# EAGLE board Lab7_FinalProject (EAGLE 9.0.1)
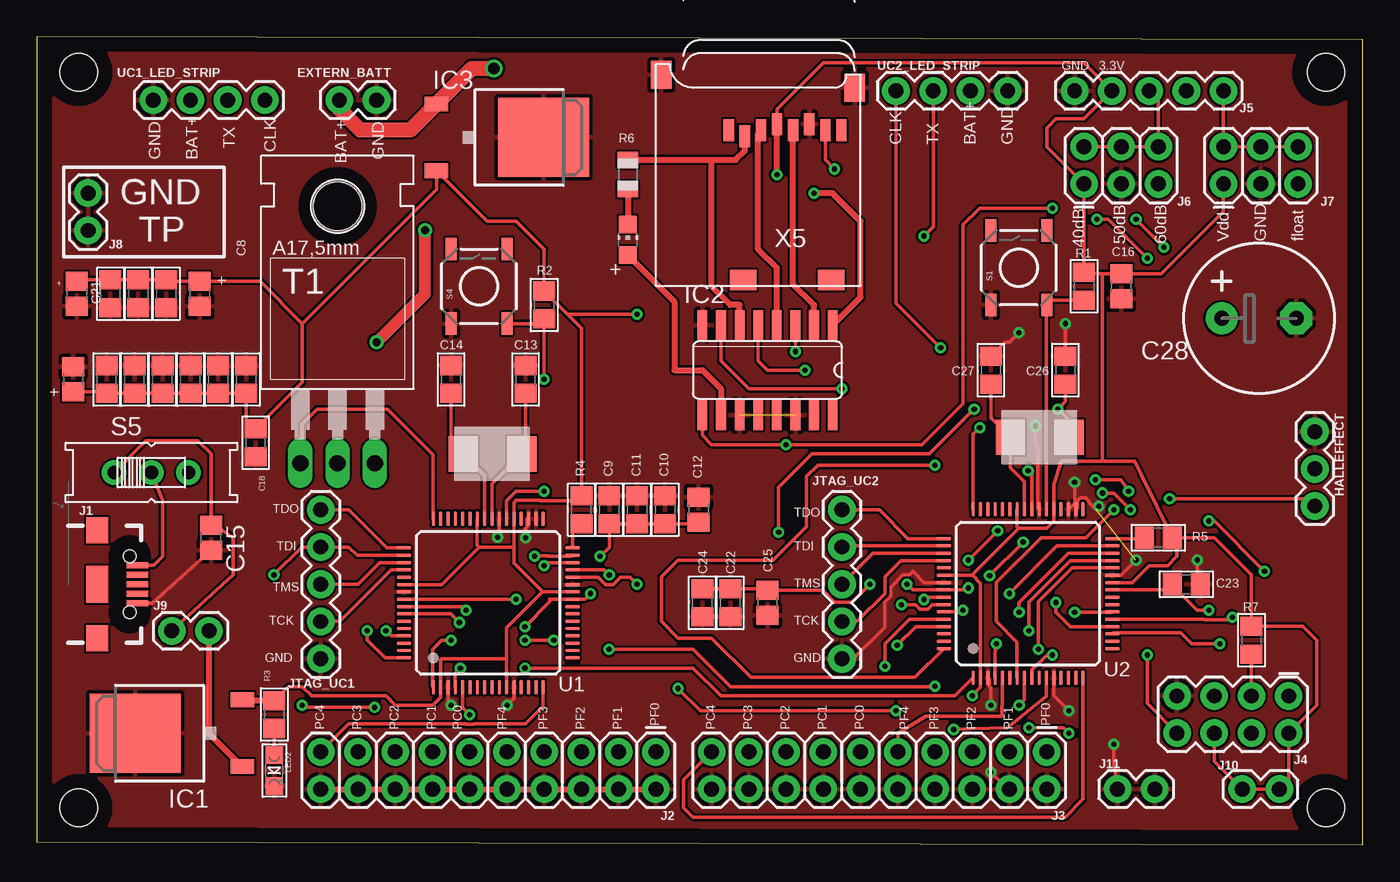
[diagram p0: board, top side]
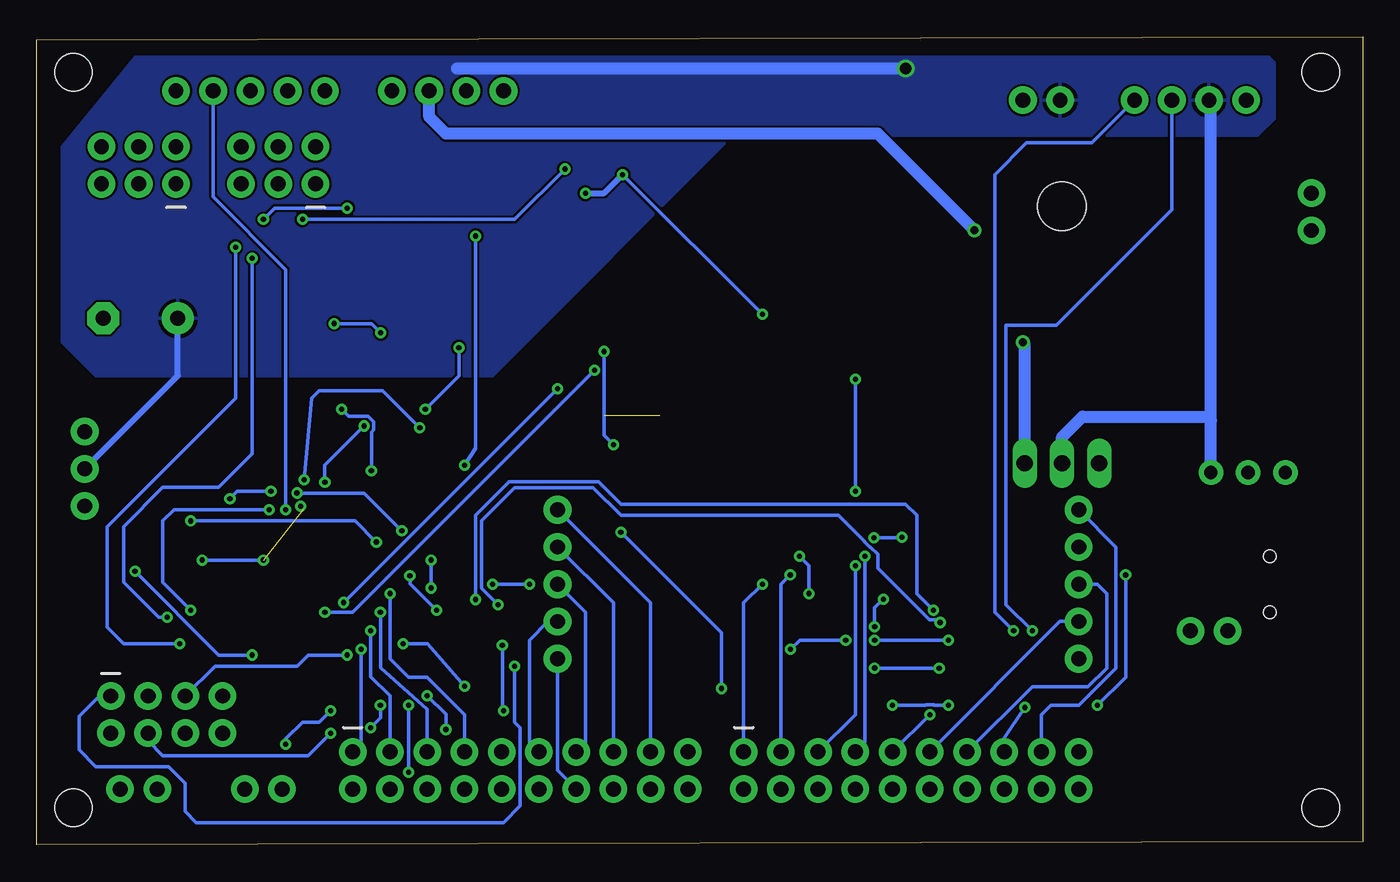
[diagram p1: board, bottom side, seen from below]

Size 90.49 x 55.13 mm. Coordinates in mm from the lower left corner, seen from the top.
Outline: 0,0.21 90.49,0 90.49,54.92 0,55.13 0,0.21
Copper layers (1*16): Top 0.035mm / dielectric 1.5mm / Bottom 0.035mm
Design rules "default": minimum track width 6mil, minimum drill 0.35mm, track to track 6mil, track to pad 6mil, pad to pad 6mil, via to via 6mil, smd to smd 6mil, copper to edge 40mil, drill to drill 6mil, minimum pad ring 10mil, minimum via ring 8mil, stop-mask expansion 4mil, vias tented up to drill 0mil, thermal gap 10mil
Holes 2.54 mm at 2.88,2.54 87.97,2.54 87.97,52.7 2.88,52.7

## Footprints (pad centres in the part's own frame; a part is rotated, then mirrored left to right if it is on the bottom)
CHIP-LED0805 = smd 1.2 x 1.2: A 0,-1.05; C 0,1.05
0805 = smd 1.3 x 1.5: 1 -0.95,0; 2 0.95,0
C0805 = smd 1.3 x 1.5: 1 -0.85,0; 2 0.85,0
E-050X100 = drill 1.016 pad 2.184: + -2.54,0 | drill 1.016 pad 2.184 octagon: - 2.54,0
1X02 = drill 1.016 pad 1.88: 1 0,0; 2 2.54,0
1X03 = drill 1.016 pad 1.88: 1 0,0; 2 2.54,0; 3 5.08,0
TO252 = smd 1 x 1.6: 1 -2.28,-4.8; 2 2.28,-4.8 | smd 5.4 x 6.2: 3 0,2.5
SO16 = smd 0.66 x 2.032: 1 -4.445,-3.073; 2 -3.175,-3.073; 3 -1.905,-3.073; 4 -0.635,-3.073; 5 0.635,-3.073; 6 1.905,-3.073; 7 3.175,-3.073; 8 4.445,-3.073; 9 4.445,3.073; 10 3.175,3.073; 11 1.905,3.073; 12 0.635,3.073; 13 -0.635,3.073; 14 -1.905,3.073; 15 -3.175,3.073; 16 -4.445,3.073
USB-B-MICRO-SMD = smd 1.45 x 0.4: D+ 2.725,0; D- 2.725,0.65; GND 2.725,-1.3; ID 2.725,-0.65; VBUS 2.725,1.3 | smd 1.5 x 1.8: SHIELD1 0,3.685; SHIELD2 0,-3.685 | smd 1.5 x 2.5: SHIELD3 0,0 | hole 0.85: 2.2,1.9; 2.2,-1.9
2X10 = drill 1.016 pad 1.88: 1 0,0; 2 0,2.54; 3 2.54,0; 4 2.54,2.54; 5 5.08,0; 6 5.08,2.54; 7 7.62,0; 8 7.62,2.54; 9 10.16,0; 10 10.16,2.54; 11 12.7,0; 12 12.7,2.54; 13 15.24,0; 14 15.24,2.54; 15 17.78,0; 16 17.78,2.54; 17 20.32,0; 18 20.32,2.54; 19 22.86,0; 20 22.86,2.54
2X4 = drill 1.016 pad 1.88: 1 -3.81,-1.27; 2 -3.81,1.27; 3 -1.27,-1.27; 4 -1.27,1.27; 5 1.27,-1.27; 6 1.27,1.27; 7 3.81,-1.27; 8 3.81,1.27
1X05 = drill 1.016 pad 1.88: 1 0,0; 2 2.54,0; 3 5.08,0; 4 7.62,0; 5 10.16,0
2X3 = drill 1.016 pad 1.88: 1 0,0; 2 0,2.54; 3 2.54,0; 4 2.54,2.54; 5 5.08,0; 6 5.08,2.54
CHIPLED_0805 = smd 1.2 x 1.2: A 0,-1.05; C 0,1.05
R0805 = smd 1.1 x 1.4: 1 -1,0; 2 1,0
TACTILE_SWITCH_SMD = smd 1.524 x 0.762: 1 -2.54,1.905; 2 2.54,1.905; 3 -2.54,-1.905; 4 2.54,-1.905
EG1218 = drill 0.9 pad 1.676: O -2.54,0; P 0,0; S 2.54,0
TO220 = drill 1.118 long: 1 -2.54,-6.35; 2 0,-6.35; 3 2.54,-6.35 | hole 3.302: 0,11.176
LQFP64 = smd 0.25 x 1: 1 -3.75,-5.75; 2 -3.25,-5.75; 3 -2.75,-5.75; 4 -2.25,-5.75; 5 -1.75,-5.75; 6 -1.25,-5.75; 7 -0.75,-5.75; 8 -0.25,-5.75; 9 0.25,-5.75; 10 0.75,-5.75; 11 1.25,-5.75; 12 1.75,-5.75; 13 2.25,-5.75; 14 2.75,-5.75; 15 3.25,-5.75; 16 3.75,-5.75; 33 3.75,5.75; 34 3.25,5.75; 35 2.75,5.75; 36 2.25,5.75; 37 1.75,5.75; 38 1.25,5.75; 39 0.75,5.75; 40 0.25,5.75; 41 -0.25,5.75; 42 -0.75,5.75; 43 -1.25,5.75; 44 -1.75,5.75; 45 -2.25,5.75; 46 -2.75,5.75; 47 -3.25,5.75; 48 -3.75,5.75 | smd 1 x 0.25: 17 5.75,-3.75; 18 5.75,-3.25; 19 5.75,-2.75; 20 5.75,-2.25; 21 5.75,-1.75; 22 5.75,-1.25; 23 5.75,-0.75; 24 5.75,-0.25; 25 5.75,0.25; 26 5.75,0.75; 27 5.75,1.25; 28 5.75,1.75; 29 5.75,2.25; 30 5.75,2.75; 31 5.75,3.25; 32 5.75,3.75; 49 -5.75,3.75; 50 -5.75,3.25; 51 -5.75,2.75; 52 -5.75,2.25; 53 -5.75,1.75; 54 -5.75,1.25; 55 -5.75,0.75; 56 -5.75,0.25; 57 -5.75,-0.25; 58 -5.75,-0.75; 59 -5.75,-1.25; 60 -5.75,-1.75; 61 -5.75,-2.25; 62 -5.75,-2.75; 63 -5.75,-3.25; 64 -5.75,-3.75
NX5032GA-16MHZCRYSTAL = smd 2 x 2.4: P$1 0,0; P$2 4,0
1X04 = drill 1.016 pad 1.88: 1 0,0; 2 2.54,0; 3 5.08,0; 4 7.62,0
MICROSD = smd 0.7 x 1.5: 1 9,-10.64; 2 7.9,-10.24; 3 6.8,-10.64; 4 5.7,-11.04; 5 4.6,-10.64; 6 3.5,-11.04; 7 2.4,-10.64; 8 1.3,-10.64 | smd 1.8 x 1.4: CD1 2,-0.44; CD2 8,-0.44 | smd 1.4 x 1.9: MT1 0.4,-13.54; MT2 13.6,-14.44

## Placement (x,y rotation side)
ACT  RED  [CHIP-LED0805]  40.34,41.28 0 top
C1  0.01uF  [0805]  4.78,31.75 90 top
C2  10uF/10V  [C0805]  2.49,31.75 90 top
C3  0.01uF  [0805]  6.94,37.59 270 top
C4  0.1uF  [0805]  12.4,31.75 90 top
C5  0.01uF  [0805]  14.31,31.75 90 top
C6  0.1uF  [0805]  5.03,37.59 270 top
C7  1uF  [0805]  8.84,37.59 270 top
C8  0.01uF  [C0805]  11.13,37.59 270 top
C9  0.1uF  [0805]  39.07,22.86 90 top
C10  0.1uF  [0805]  42.88,22.86 90 top
C11  1uF  [0805]  40.98,22.86 90 top
C12  2.2uF  [C0805]  45.17,22.86 90 top
C13  10pF  [0805]  33.36,31.75 270 top
C14  10pF  [0805]  28.28,31.75 270 top
C15  4.7uF  [C0805]  11.89,20.95 270 top
C16  4,7uF  [C0805]  74,38.1 270 top
C17  0.1uF  [0805]  8.59,31.75 90 top
C18  0.01uF  [0805]  14.94,27.43 270 top
C19  0.1uF  [0805]  6.69,31.75 90 top
C20  1uF  [0805]  10.5,31.75 90 top
C21  0.01uF  [C0805]  2.75,37.59 270 top
C22  0.1uF  [0805]  47.33,16.51 270 top
C23  0.1uF  [0805]  78.44,17.78 0 top
C24  1uF  [0805]  45.42,16.51 270 top
C25  2.2uF  [C0805]  49.87,16.51 270 top
C26  10pF  [0805]  70.19,32.39 270 top
C27  10pF  [0805]  65.11,32.39 270 top
C28  1000uF  [E-050X100]  83.39,35.92 0 top
EXTERN_BATT  [1X02]  23.2,50.8 180 top
HALLEFFECT  [1X03]  87.2,28.19 270 top
IC1  7812DT  [TO252]  9.23,7.62 90 top
IC2  4050D  [SO16]  49.87,32.39 180 top
IC3  3.3VReg1  [TO252]  32.09,48.26 270 top
J1  [USB-B-MICRO-SMD]  4.15,17.78 0 top
J2  LA1  [2X10]  42.25,6.35 180 top
J3  LA2  [2X10]  68.92,6.35 180 top
J4  ESP8266  [2X4]  81.62,8.89 180 top
J5  MICROPHONE  [1X05]  80.98,51.44 180 top
J6  GAIN SELECT  [2X3]  71.46,45.08 0 top
J7  A/R SELECT  [2X3]  80.98,45.08 0 top
J8  [1X02]  3.51,41.91 90 top
J9  [1X02]  9.23,14.61 0 top
J10  3.3V TESTPOINT  [1X02]  84.79,3.81 180 top
J11  GND TESTPOINT  [1X02]  73.74,3.81 0 top
JTAG_UC1  [1X05]  19.39,12.7 90 top
JTAG_UC2  [1X05]  54.95,12.7 90 top
LED2  [CHIPLED_0805]  16.21,5.08 180 top
R1  10k  [0805]  71.46,38.1 90 top
R2  10k  [0805]  34.63,36.83 90 top
R3  1k  [0805]  16.21,8.89 90 top
R4  1M  [0805]  37.17,22.86 90 top
R5  1M  [0805]  76.54,20.95 0 top
R6  1K  [R0805]  40.34,45.72 270 top
R7  10k  [0805]  82.89,13.97 90 top
S1  MOMENTARY_SW  [TACTILE_SWITCH_SMD]  67.01,39.37 90 top
S4  MOMENTARY_SW  [TACTILE_SWITCH_SMD]  30.18,38.1 90 top
S5  [EG1218]  7.83,25.4 0 top
T1  TIP31  [TO220]  20.53,32.39 0 top
U1  TM4C123GH6PM  [LQFP64]  30.82,16.51 0 top
U2  TM4C123GH6PM  [LQFP64]  67.65,17.14 0 top
U$45  NX5032GA-16MHZCRYSTAL  [NX5032GA-16MHZCRYSTAL]  33.1,26.67 180 top
U$48  NX5032GA-16MHZCRYSTAL  [NX5032GA-16MHZCRYSTAL]  70.44,27.81 180 top
UC1_LED_STRIP  [1X04]  15.58,50.8 180 top
UC2_LED_STRIP  [1X04]  58.63,51.44 0 top
X5  MICROSD  [MICROSD]  56.22,38.1 180 top

## Library data of the parts
ACT C2 C8 C12 C15 C16 C21 C25 R6 S5 X5 = adafruit
C1 C3-C7 C9-C11 C13 C14 C17-C20 C22-C24 C26 C27 LED2 R1-R5 R7 = microbuilder
C28 = cap-master
EXTERN_BATT HALLEFFECT J2-J5 J8-J11 JTAG_UC1 JTAG_UC2 = SparkFun-Connectors
IC1 IC3 = linear2
IC2 = 40xx
J1 = SparkFun-Connectors; PROD_ID: CONN-11752
J6 J7 = SparkFun-Connectors; PROD_ID: CONN-11566
S1 S4 = SparkFun
T1 = transistor
U1 U2 = ti-tiva
U$45 U$48 = Shawn'sCustomComponents
UC1_LED_STRIP UC2_LED_STRIP = SparkFun-Connectors; PROD_ID: CONN-09696

## Nets
3.3V: C1.1 C2.1 C3.1 C4.1 C5.1 C6.1 C7.1 C8.1 C16.1 C17.1 C18.1 C19.1 C20.1 C21.1 IC1.2 IC2.1 IC3.2 J4.2 J4.6 J5.4 J6.1 J7.1 J10.1 J10.2 R1.2 R2.2 R3.2 R4.2 R5.2 R7.2 U1.2 U1.11 U1.26 U1.37 U1.42 U1.54 U2.2 U2.11 U2.26 U2.37 U2.42 U2.54 X5.4
BATT_IN: C28.+ EXTERN_BATT.2 HALLEFFECT.2 IC3.1 S5.S T1.2 UC1_LED_STRIP.3
ESP_GPIO0: J4.3 R7.1
GND: C1.2 C2.2 C3.2 C4.2 C5.2 C6.2 C7.2 C8.2 C9.2 C10.2 C11.2 C12.2 C13.1 C14.1 C15.2 C16.2 C17.2 C18.2 C19.2 C20.2 C21.2 C22.2 C23.2 C24.2 C25.2 C26.1 C27.1 C28.- EXTERN_BATT.1 HALLEFFECT.1 IC1.3 IC2.8 IC2.11 IC2.14 IC3.3 J1.GND J2.2 J2.4 J2.6 J2.8 J2.10 J2.12 J2.14 J2.16 J2.18 J2.20 J3.2 J3.4 J3.6 J3.8 J3.10 J3.12 J3.14 J3.16 J3.18 J3.20 J4.7 J5.5 J6.3 J7.3 J8.1 J8.2 J11.1 J11.2 JTAG_UC1.1 JTAG_UC2.1 LED2.C S1.1 S4.1 U1.3 U1.12 U1.27 U1.34 U1.35 U1.39 U1.55 U2.3 U2.12 U2.27 U2.34 U2.35 U2.39 U2.55 UC1_LED_STRIP.4 UC2_LED_STRIP.4 X5.6 X5.MT1 X5.MT2
LED_PW_IN: T1.3 UC2_LED_STRIP.3
MIC_AR: J5.1 J7.2 J7.4 J7.6
MIC_GAIN: J5.3 J6.2 J6.4 J6.6
N$1: C13.2 U1.40 U$45.P$1
N$2: C9.1 C10.1 C11.1 C12.1 U1.25 U1.56
N$3: C26.2 U2.40 U$48.P$1
N$8: ACT.A IC2.10
N$10: IC2.2 X5.5
N$11: C22.1 C23.1 C24.1 C25.1 U2.25 U2.56
N$12: C27.2 U2.41 U$48.P$2
N$14: R1.1 S1.3 U2.38
N$15: R5.1 U2.32
N$16: IC2.6 R6.1 X5.2
N$17: ACT.C R6.2
N$18: IC2.4 X5.3
N$19: J6.5
N$20: J7.5
N$22: IC1.1 J9.2
OSC1: C14.2 U1.41 U$45.P$2
POWER_IN: C15.1 J9.1 S5.O
POWER_LED: LED2.A R3.1
RESET: R2.1 S4.3 U1.38
SDCARD_CD: X5.CD1
UC1_PB3/LED_SW: T1.1 U1.48
UC1_PC0/TCK: J2.11 JTAG_UC1.2 U1.52
UC1_PC1/TMS: J2.13 JTAG_UC1.3 U1.51
UC1_PC2/TDI: J2.15 JTAG_UC1.4 U1.50
UC1_PC3/TDO: J2.17 JTAG_UC1.5 U1.49
UC1_PC4: J2.19 U1.16
UC1_PC5: U1.15
UC1_PC6: U1.14
UC1_PC7: U1.13
UC1_PD0/SSI3_CLK: U1.61 UC1_LED_STRIP.1
UC1_PD3/SSI3_TX: U1.64 UC1_LED_STRIP.2
UC1_PF0: J2.1 U1.28
UC1_PF1: J2.3 U1.29
UC1_PF2: J2.5 U1.30
UC1_PF3: J2.7 U1.31
UC1_PF4: J2.9 U1.5
UC2_PA2/SDCARD_CLK: IC2.3 IC2.9 U2.19
UC2_PA3/SDCARD_CS: IC2.7 U2.20
UC2_PA4/SDCARD_DO: U2.21 X5.7
UC2_PA5/SDCARD_DI: IC2.5 U2.22
UC2_PB3/HALLEFFECT: HALLEFFECT.3 U2.48
UC2_PC0/TCK: J3.11 JTAG_UC2.2 U2.52
UC2_PC1/TMS: J3.13 JTAG_UC2.3 U2.51
UC2_PC2/TDI: J3.15 JTAG_UC2.4 U2.50
UC2_PC3/TDO: J3.17 JTAG_UC2.5 U2.49
UC2_PC4: J3.19 U2.16
UC2_PD0/SSI3_CLK: U2.61 UC2_LED_STRIP.1
UC2_PD3/SSI3_TX: U2.64 UC2_LED_STRIP.2
UC2_PE0/ESP_GPIO2: J4.5 U2.9
UC2_PE1/ESP_RESET: J4.4 U2.8
UC2_PE2/MIC_OUT: J5.2 U2.7
UC2_PE4/ESP_TX: J4.8 U2.59
UC2_PE5/ESP_RX: J4.1 U2.60
UC2_PF0: J3.1 U2.28
UC2_PF1: J3.3 U2.29
UC2_PF2: J3.5 U2.30
UC2_PF3: J3.7 U2.31
UC2_PF4: J3.9 U2.5
UC12_PB4/CLK: U1.58 U2.58
UC12_PB5/FSS: U1.57 U2.57
UC12_PB6/7/RX2TX: U1.1 U2.4
UC12_PB6/7/TX2RX: U1.4 U2.1
VBUS: J1.VBUS S5.P
WAKE: R4.1 U1.32

## Tracks (layer width: path | path; a pad name or v marks a point on that pad's centre or on a via)
3.3V  (via drill 0.35)
  Top 0.254: U1.42 30.07,20.43 30.18,20.32 | U1.54 27.62,17.76 30.18,20.32 | 32.57,20.32 U1.37 32.57,23.34 32.72,23.5 34.33,23.5 34.35,23.47 36.83,23.47 R4.2 37.17,35.24 36.21,36.19 | 32.57,20.32 32.57,19.2 34.51,17.26 | 34.51,17.26 U1.26 | 30.18,20.32 32.57,20.32 | U1.11 32.07,12.7 | 32.07,12.7 32.07,14.82 34.51,17.26 | R3.2 17.17,10.79 18.12,10.79 18.75,10.16 23.83,10.16 24.47,9.53 27.01,9.53 27.57,10.09 U1.2 27.57,12.62 27.64,12.7 32.07,12.7 | C2.1 4.68,30.9 C1.1 C19.1 C17.1 C20.1 C4.1 C5.1 14.31,29.02 C18.1 18.12,31.56 18.12,35.56 | 36.21,36.19 R2.2 34.63,40.64 32.72,42.55 30.72,42.55 IC3.2 27.29,44.73 18.12,35.56 | v40.98,36.19 36.21,36.19 | J4.6 80.35,5.71 J10.2 J10.1 85.43,4.45 J4.2 87.33,9.53 87.33,13.97 86.38,14.92 R7.2 82.89,18.41 80.35,20.95 77.81,20.95 | 77.81,20.95 R5.2 75.36,25.24 74.95,26.16 72.73,26.16 | X5.4 50.52,50.18 53.68,53.34 71.46,53.34 J5.4 71.46,49.53 69.55,49.53 68.92,48.89 68.92,47.62 J6.1 71.46,39.37 | R1.2 71.46,39.37 | 72.73,38.95 C16.1 76.75,38.95 80.98,43.18 J7.1 | 72.73,38.95 71.88,38.95 71.46,39.37 | U2.42 66.9,21.7 67.01,21.59 | 67.01,21.59 68.92,21.59 69.4,22.07 U2.37 69.4,24.61 69.93,26.16 72.73,26.16 | U2.54 63.82,18.39 63.84,18.41 | 63.84,18.41 67.01,21.59 | 63.84,18.41 64.4,17.86 U2.2 64.4,10.74 v63.84,10.18 | U2.26 74.75,17.89 75.9,19.05 77.17,19.05 77.81,19.68 77.81,20.95 | 72.73,38.95 72.73,26.16 | U2.11 68.9,10.14 66.25,8 v62.57,7.87 | 18.12,35.56 15.23,38.44 C8.1 8.94,38.44 C7.1 C3.1 C6.1 2.85,38.54 C21.1
  Top 0.406: R3.2 14.09,9.84 IC1.2 | IC2.1 56.22,37.36 56.22,42.55 54.31,44.45 v53.04,44.45 | v50.5,45.72 50.52,45.73 X5.4
  Bottom 0.254: v50.5,45.72 v40.98,36.19 | v63.84,10.18 62.57,8.91 v62.57,7.87
  Bottom 0.406: v53.04,44.45 51.77,44.45 v50.5,45.72
BATT_IN  (via drill 0.8)
  Top 1.016: EXTERN_BATT.2 20.66,50.17 22.05,48.77 25.51,48.77 IC3.1 29.7,52.96 v31.2,52.96
  Bottom 0.406: HALLEFFECT.2 80.85,32 C28.+
  Bottom 0.813: 61.8,52.96 v31.2,52.96 | S5.S 10.37,28.96 | 10.37,28.96 10.37,50.67 UC1_LED_STRIP.3 | T1.2 20.53,27.81 19.13,29.21 10.62,29.21 10.37,28.96
  pour Bottom: 6.05,53.34 6.05,49.53 7.19,48.39 43.01,48.39 59.39,32 86.44,32 88.73,34.29 88.73,47.62 83.77,53.72 6.43,53.72
ESP_GPIO0
  Top 0.254: J4.3 R7.1
GND  (via drill 0.35)  (2 unrouted)
  Top 0.254: J1.GND 7.89,16.48 C15.2 | U1.39 31.57,21.09 v31.45,20.98 | v33.36,20.95 33.36,21.59 33.47,21.7 33.47,22.16 U1.35 | C26.1 v70.19,35.56 | v67.01,34.92 66.38,34.29 66.06,34.29 C27.1 | U1.3 28.07,9.73 v28.28,9.53 | U1.12 32.57,10 v32.09,9.53 | U2.27 73.98,18.39 v75.01,19.43 | v79.2,19.43 79.2,17.97 C23.2 | U2.12 69.4,10.19 v70.44,9.14 | v73.49,6.86 73.49,5.59 J11.1 | U2.3 64.99,11.3 64.99,10.84 65.11,10.71 v65.11,9.52 | v65.11,4.95 66.25,3.81 J3.4 | U2.35 70.82,23.32 v70.82,24.74 | v68.15,28.57 68.15,27.47 68.3,26.94 68.3,22.99 U2.39 | U2.55 60.55,17.89 59.77,18.67 59.54,18.44 59.12,18.44 58.27,17.59 58.27,16.98 57.87,16.57 57.87,14.86 55.71,12.7 JTAG_UC2.1 | v72.47,23.09 72.27,22.89 71.8,23.37 71.8,23.46 71.58,23.67 71.21,23.67 70.99,23.46 70.99,22.99 U2.34
  Top 0.406: J2.20 J2.18 J2.16 J2.14 J2.12 J2.10 J2.8 J2.6 J2.4 J2.2
  Bottom 0.254: v31.45,20.98 31.47,20.95 v33.36,20.95 | v70.19,35.56 67.65,35.56 v67.01,34.92 | v28.28,9.53 29.25,9.53 29.27,9.55 29.82,9.55 29.84,9.53 v32.09,9.53 | v75.01,19.43 v79.2,19.43 | v70.44,9.14 71.2,8.38 72.34,8.38 73.49,7.24 v73.49,6.86 | v65.11,9.52 v65.11,4.96 v65.11,4.95 | JTAG_UC2.1 54.95,5.08 J3.14 | v70.82,24.74 70.82,25.91 v68.15,28.57
  pour Top: 0.2,0.03 0.2,54.77 90.39,54.77 90.39,0.03
LED_PW_IN  (via drill 0.55)
  Top 0.813: v23.2,34.29 26.5,37.59 v26.5,41.91
  Bottom 0.813: T1.3 23.07,34.16 v23.2,34.29 | v26.5,41.91 33.1,48.51 62.57,48.51 63.71,49.66 UC2_LED_STRIP.3
MIC_AR
  Top 0.254: J7.6 J7.4 J7.2 J5.1
MIC_GAIN
  Top 0.254: J6.2 J6.4 J6.6 76.54,50.8 J5.3
N$1
  Top 0.254: U1.40 31.07,24.63 U$45.P$1 33.36,26.92 C13.2
N$2  (via drill 0.35)
  Top 0.254: v37.8,17.14 37.42,16.76 U1.25 35.01,16.76 35.01,16.57 v33.31,14.88 | v38.44,19.68 39.07,20.32 C9.1 C11.1 C10.1 44.69,21.91 C12.1 | U1.56 v32.72,16.76
  Bottom 0.254: v37.8,17.14 37.8,19.05 v38.44,19.68 | v32.72,16.76 33.31,16.17 v33.31,14.88
N$3  (via drill 0.35)
  Top 0.254: U2.40 67.9,25.28 v67.65,25.53 | U$48.P$1 70.44,28.96 v69.68,29.72 70.19,30.23 C26.2
  Bottom 0.254: v69.68,29.72 69.19,29.23 67.88,29.23 67.5,28.85 67.5,28.3 67.65,28.15 v67.65,25.53
N$8
  Top 0.406: ACT.A 43.52,37.05 43.52,32.39 45.42,32.39 46.69,31.11 IC2.10
N$10
  Top 0.406: IC2.2 53.04,36.83 51.62,38.25 X5.5
N$11  (via drill 0.35)
  Top 0.254: U2.25 77.11,17.39 77.46,17.75 | 77.46,17.75 C23.1 | C24.1 C22.1 49.77,17.46 C25.1 53.64,17.36 54.44,16.56 55.63,16.56 v56.85,17.78 | v59.39,17.78 59.78,17.39 U2.56 63.45,17.39 v63.58,17.53 | v63.58,19.43 v65.57,21.42 | v72.73,24 73.49,24 v74.63,22.86 | v79.96,16 79.2,16 77.46,17.75
  Bottom 0.254: v56.85,17.78 v59.39,17.78 | v63.58,17.53 v63.58,19.43 | v65.57,21.42 68.15,24 v72.73,24 | v74.63,22.86 81.11,22.86 81.87,22.1 81.87,17.91 v79.96,16
N$12
  Top 0.254: U2.41 67.4,24.76 66.44,25.72 U$48.P$2 65.11,29.15 C27.2
N$14
  Top 0.254: R1.1 69.24,37.15 S1.3 68.9,36.81 U2.38
N$15
  Top 0.254: R5.1 75.53,20.89 U2.32
N$16
  Top 0.406: R6.1 46.06,46.72 | 46.06,46.72 47.69,46.72 48.32,47.34 X5.2 | IC2.6 47.96,36.83 47.33,36.83 46.06,38.1 46.06,46.72
N$17
  Top 0.406: R6.2 ACT.C
N$18
  Top 0.406: IC2.4 50.5,39.37 49.23,40.64 49.23,48.56 X5.3
N$22
  Top 0.406: IC1.1 11.77,7.6 J9.2
OSC1
  Top 0.254: U1.41 30.57,25.21 U$45.P$2 28.28,27.5 C14.2
POWER_IN
  Top 0.254: J9.1 13.42,18.41 13.42,20.95 12.19,21.8 C15.1 11.89,26.67 11,27.56 7.45,27.56 S5.O
POWER_LED
  Top 0.254: LED2.A R3.1
RESET  (via drill 0.35)
  Top 0.254: 32.09,22.28 U1.38 32.07,23.48 32.72,24.13 v34.63,24.13 | v34.63,31.75 R2.1 34.31,35.56 S4.3
  Bottom 0.254: v34.63,24.13 v34.63,31.75
UC1_PB3/LED_SW
  Top 0.254: U1.48 27.07,26.61 23.96,29.72 19.13,29.72 18.12,28.7 18.12,26.16 T1.1
UC1_PC0/TCK
  Top 0.254: U1.52 24.18,18.76 20.66,15.24 JTAG_UC1.2
  Bottom 0.254: J2.11 20.66,15.24 JTAG_UC1.2
UC1_PC1/TMS
  Top 0.254: U1.51 23.41,19.26 21.93,17.78 JTAG_UC1.3
  Bottom 0.254: J2.13 22.56,10.79 18.75,10.79 17.48,12.07 17.48,17.14 18.12,17.78 JTAG_UC1.3
UC1_PC2/TDI  (via drill 0.35)
  Top 0.254: U1.50 21.85,19.76 21.29,20.32 JTAG_UC1.4 18.09,20.32 v16.19,18.41 | v23.05,9.38 18.26,9.38 v18.12,9.53
  Bottom 0.254: J2.15 24.47,7.32 v23.05,9.38 | v18.12,9.53 16.19,11.45 v16.19,18.41
UC1_PC3/TDO
  Top 0.254: U1.49 23.89,20.26 21.29,22.86 JTAG_UC1.5
  Bottom 0.254: J2.17 21.93,8.89 21.29,9.53 19.39,9.53 16.85,12.07 16.85,20.32 JTAG_UC1.5
UC1_PC4
  Top 0.254: J2.19 21.29,8.26 29.25,8.26 29.27,8.23 29.82,8.23 29.84,8.26 33.36,8.26 34.57,9.46 U1.16
UC1_PD0/SSI3_CLK  (via drill 0.35)
  Top 0.254: U1.61 24.18,14.26 v23.83,14.61
  Bottom 0.254: v23.83,14.61 25.1,15.88 25.1,45.72 22.94,47.88 18.5,47.88 UC1_LED_STRIP.1
UC1_PD3/SSI3_TX  (via drill 0.35)
  Top 0.254: U1.64 23.77,12.76 22.56,13.97 v22.56,14.61
  Bottom 0.254: v22.56,14.61 24.34,16.38 24.34,35.43 20.91,35.43 13.04,43.31 UC1_LED_STRIP.2
UC1_PF0  (via drill 0.35)
  Top 0.254: v40.98,17.78 40.5,18.26 39.85,18.26 39.34,17.76 38.8,17.76 38.3,18.26 U1.28
  Bottom 0.254: J2.1 42.25,16.51 v40.98,17.78
UC1_PF1  (via drill 0.35)
  Top 0.254: v39.07,18.41 38.73,18.76 U1.29
  Bottom 0.254: J2.3 39.71,17.78 v39.07,18.41
UC1_PF2  (via drill 0.35)
  Top 0.254: v34.63,19.05 34.84,19.26 U1.30
  Bottom 0.254: J2.5 34.63,8.89 v34.63,19.05
UC1_PF3  (via drill 0.35)
  Top 0.254: U1.31 36.5,19.69 34.91,19.69 34.9,19.71 34.35,19.71 34.34,19.69 v33.98,19.69
  Bottom 0.254: v33.98,19.69 33.98,19.34 33.97,19.32 33.97,7.01 J2.7
UC1_PF4  (via drill 0.35)
  Top 0.254: v29.55,8.89 29.07,9.37 U1.5
  Bottom 0.254: J2.9 v29.55,8.89
UC2_PA2/SDCARD_CLK  (via drill 0.35)
  Top 0.254: IC2.3 v51.77,33.66 | IC2.9 45.42,27.94 46.06,27.31 v51.14,27.31 60.41,27.31 63.2,30.1 63.2,42.29 64.34,43.43 v69.3,43.43 | v75.01,42.67 v76.92,40.77 | v80.73,13.72 78.82,13.72 78.06,14.48 73.48,14.48 U2.19
  Bottom 0.254: v51.77,33.66 51.77,27.94 v51.14,27.31 | v69.3,43.43 74.25,43.43 v75.01,42.67 | v76.92,40.77 76.92,30.48 85.68,21.72 85.68,14.86 84.54,13.72 v80.73,13.72
UC2_PA3/SDCARD_CS  (via drill 0.35)
  Top 0.254: IC2.7 46.69,33.02 48.6,31.11 v54.95,31.11 | v69.55,16.53 69.55,15.88 70.53,14.89 U2.20
  Bottom 0.254: v54.95,31.11 69.53,16.53 v69.55,16.53
UC2_PA4/SDCARD_DO  (via drill 0.35)
  Top 0.254: U2.21 79.64,15.39 79.69,15.34 81.38,15.34 v81.57,15.54 | v75.77,40 73.11,42.67 v72.34,42.67 | v54.44,46.1 53.82,46.72 X5.7
  Bottom 0.254: v81.57,15.54 82.17,15.54 84.54,17.91 84.54,21.72 81.87,24.38 78.06,24.38 75.77,26.67 v75.77,40 | v72.34,42.67 57.87,42.67 v54.44,46.1
UC2_PA5/SDCARD_DI  (via drill 0.35)
  Top 0.254: IC2.5 49.23,33.02 49.87,32.39 v52.43,32.39 | v70.82,15.88 73.38,15.88 U2.22
  Bottom 0.254: v52.43,32.39 68.94,15.88 v70.82,15.88
UC2_PB3/HALLEFFECT  (via drill 0.35)
  Top 0.254: U2.48 63.9,28 v64.34,28.45 | v72.24,24.91 73.97,24.91 v74.5,24.13 | v77.3,23.62 86.7,23.62 HALLEFFECT.3
  Bottom 0.254: v64.34,28.45 66.88,30.99 71.2,30.99 71.73,30.46 v72.24,24.91 | v74.5,24.13 76.79,24.13 v77.3,23.62
UC2_PC0/TCK
  Top 0.254: 55.2,15.24 JTAG_UC2.2 55.96,15.24 57.87,17.14 57.87,18.29 58.97,19.39 U2.52
  Bottom 0.254: J3.11 56.85,6.98 56.85,13.97 55.58,15.24 JTAG_UC2.2
UC2_PC1/TMS
  Top 0.254: U2.51 57.06,19.89 JTAG_UC2.3
  Bottom 0.254: J3.13 53.04,6.98 53.04,15.88 JTAG_UC2.3
UC2_PC2/TDI
  Top 0.254: U2.50 55.02,20.39 JTAG_UC2.4
  Bottom 0.254: J3.15 51.14,16.51 JTAG_UC2.4
UC2_PC3/TDO
  Top 0.254: JTAG_UC2.5 57.49,22.86 59.45,20.89 U2.49
  Bottom 0.254: J3.17 48.6,16.51 JTAG_UC2.5
UC2_PC4
  Top 0.254: J3.19 44.15,4.45 44.15,2.54 44.79,1.9 70.19,1.9 71.4,3.12 U2.16
UC2_PD0/SSI3_CLK  (via drill 0.35)
  Top 0.254: U2.61 59.98,14.89 v58.71,13.63 | v58.63,9.14 45.29,9.14 v43.77,10.67 | v50.63,21.34 50.63,24.38 52.91,26.67 60.91,26.67 v63.96,29.72 | v61.68,33.91 58.63,36.96 UC2_LED_STRIP.1
  Bottom 0.254: v58.71,13.63 58.71,9.23 v58.63,9.14 | v43.77,10.67 43.77,14.48 v50.63,21.34 | v63.96,29.72 61.68,32 v61.68,33.91
UC2_PD3/SSI3_TX  (via drill 0.35)
  Top 0.254: U2.64 59.93,11.43 48.72,11.43 46.06,14.1 43.77,14.1 42.63,15.24 42.63,18.29 43.77,19.43 50.25,19.43 52.53,21.72 52.53,25.15 53.29,25.91 v61.3,25.91 | v60.53,41.53 61.17,42.16 UC2_LED_STRIP.2
  Bottom 0.254: v61.3,25.91 60.53,27.05 v60.53,41.53
UC2_PE0/ESP_GPIO2  (via drill 0.35)
  Top 0.254: U2.9 67.9,11.93 68.92,12.95 v69.3,12.95
  Bottom 0.254: v69.3,12.95 71.96,12.95 72.73,12.19 78.31,12.19 J4.5
UC2_PE1/ESP_RESET  (via drill 0.35)
  Top 0.254: U2.8 67.4,9.89 v67.03,9.53 | v67.69,8 70.06,8 v70.44,7.62
  Bottom 0.254: v67.03,9.53 67.03,8.66 v67.69,8 | v70.44,7.62 71.96,6.1 81.87,6.1 82.89,7.11 J4.4
UC2_PE2/MIC_OUT  (via drill 0.35)
  Top 0.254: U2.7 66.9,13.83 65.49,15.24 65.49,17.91 68.53,20.95 71.58,20.95 v73.49,22.86
  Bottom 0.254: v73.49,22.86 73.49,39.24 78.44,44.2 J5.2
UC2_PE4/ESP_TX  (via drill 0.35)
  Top 0.254: U2.59 63.09,15.89 v63.2,16 | v65.02,18.37 v67.31,20.66 | v79.96,22.1 80.35,22.1 v83.77,18.67 | v75.77,12.95 75.77,9.65 J4.8
  Bottom 0.254: v63.2,16 65.02,17.82 v65.02,18.37 | v67.31,20.66 68.75,22.1 v79.96,22.1 | v83.77,18.67 78.06,12.95 v75.77,12.95
UC2_PE5/ESP_RX  (via drill 0.35)
  Top 0.254: U2.60 59.55,15.39 57.87,13.72 v57.87,12.19
  Bottom 0.254: v57.87,12.19 57.87,8.38 57.49,8 57.49,2.67 58.63,1.52 79.58,1.52 80.35,2.29 80.35,4.19 81.49,5.33 86.44,5.33 87.58,6.48 87.58,8.76 86.19,10.16 J4.1
UC2_PF0  (via drill 0.35)
  Top 0.254: U2.28 70.67,18.89 68.35,16.58 v68.35,13.34
  Bottom 0.254: J3.1 68.35,6.92 v68.35,13.34
UC2_PF1  (via drill 0.35)
  Top 0.254: v67.69,14.61 67.69,16.55 70.53,19.39 U2.29
  Bottom 0.254: J3.3 66.38,10.16 67.69,11.48 v67.69,14.61
UC2_PF2  (via drill 0.35)
  Top 0.254: v67.03,15.88 67.03,16.53 70.4,19.89 U2.30
  Bottom 0.254: J3.5 63.84,9.27 67.03,12.09 v67.03,15.88
UC2_PF3  (via drill 0.35)
  Top 0.254: v66.38,17.14 69.63,20.39 U2.31
  Bottom 0.254: J3.7 61.3,8.89 63.84,11.43 65.11,11.43 66.38,12.7 v66.38,17.14
UC2_PF4
  Top 0.254: U2.5 65.9,10.32 65.87,8.76 60.66,8.76 58.76,7.62 J3.9
UC12_PB4/CLK  (via drill 0.35)
  Top 0.254: U1.58 28.25,15.76 v28.84,15.17 | U2.58 61.88,16.38 61.11,16.38 60.81,16.08 60.26,16.08 59.96,16.38 v59.01,16.38
  Bottom 0.254: v28.84,15.17 29.01,15.34 29.56,15.34 33.1,18.88 33.1,19.81 33.59,20.3 33.63,20.3 34.01,20.68 34.01,20.72 35.77,22.48 50.63,22.48 52.51,24.36 57.89,24.36 60.13,22.12 60.13,17.5 v59.01,16.38
UC12_PB5/FSS  (via drill 0.35)
  Top 0.254: U1.57 29.03,16.26 v29.29,16 | U2.57 60.69,16.89 v60.53,16.74
  Bottom 0.254: v29.29,16 30.43,17.14 30.43,22.48 31.2,23.24 50.63,23.24 52.15,24.77 58.25,24.77 60.53,22.48 v60.53,16.74
UC12_PB6/7/RX2TX  (via drill 0.35)
  Top 0.254: U1.1 27.01,10.82 27.01,13.34 27.64,13.97 v28.28,13.97 | v33.31,13.97 v35.28,13.97 | v39.05,13.34 44.79,13.34 47.33,10.79 61.27,10.79 v61.3,10.82 | U2.4 65.4,13.04 v65.49,13.72
  Bottom 0.254: v28.28,13.97 v33.31,13.97 | v35.28,13.97 38.41,13.97 v39.05,13.34 | v61.3,10.82 63.81,13.72 v65.49,13.72
UC12_PB6/7/TX2RX  (via drill 0.35)
  Top 0.254: U1.4 28.57,11.7 v28.91,12.04 | v33.31,12.07 44.79,12.07 46.69,10.16 62.66,10.16 U2.1
  Bottom 0.254: v28.91,12.04 33.29,12.04 v33.31,12.07
VBUS
  Top 0.254: J1.VBUS 7.99,19.08 8.59,19.68 8.59,23.5 S5.P
WAKE
  Top 0.254: U1.32 36.57,21.31 R4.1

## Text on the board
tPlace: GND | 3.3V | TX | CLK | TX | BAT+ | GND | GND | BAT+ | CLK | BAT+ | GND | GND | 40dB | 50dB | 60dB | TP | Vdd | GND | float | + | + | + | TDO | TDO | TDI | TDI | TMS | TMS | TCK | TCK | GND | GND | PC4 | PC3 | PC2 | PC1 | PC0 | PF4 | PF3 | PF2 | PF1 | PF0 | PC4 | PC3 | PC2 | PC1 | PC0 | PF4 | PF3 | PF2 | PF1 | PF0
tOrigins: EE445L- POV Globe | Shawn Victor | Shivani Gupta | Rita Kambil | Keeshan Patel